# Altium PCB ZvezdaInputSelector.PcbDoc
Units mm, origin at the board's own origin, x right, y up, seen from the top; angles counter-clockwise.
Board outline 99.06 x 48.26 mm, 2 copper layers (Top Layer, Bottom Layer); 54 components, 59 nets, 227 pads, 69 vias.
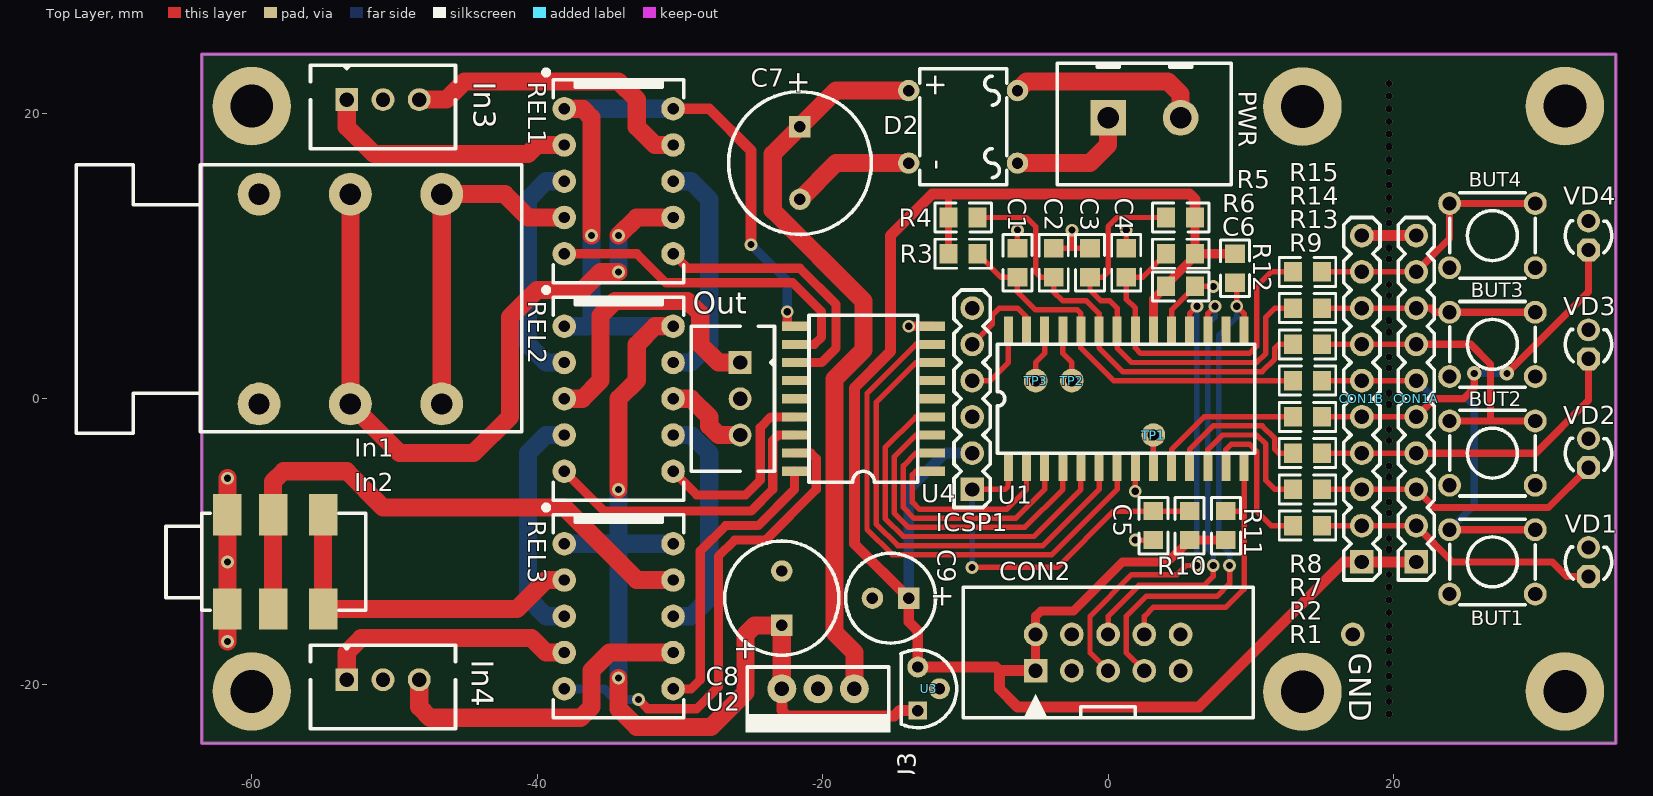
[diagram p0: Top Layer view]
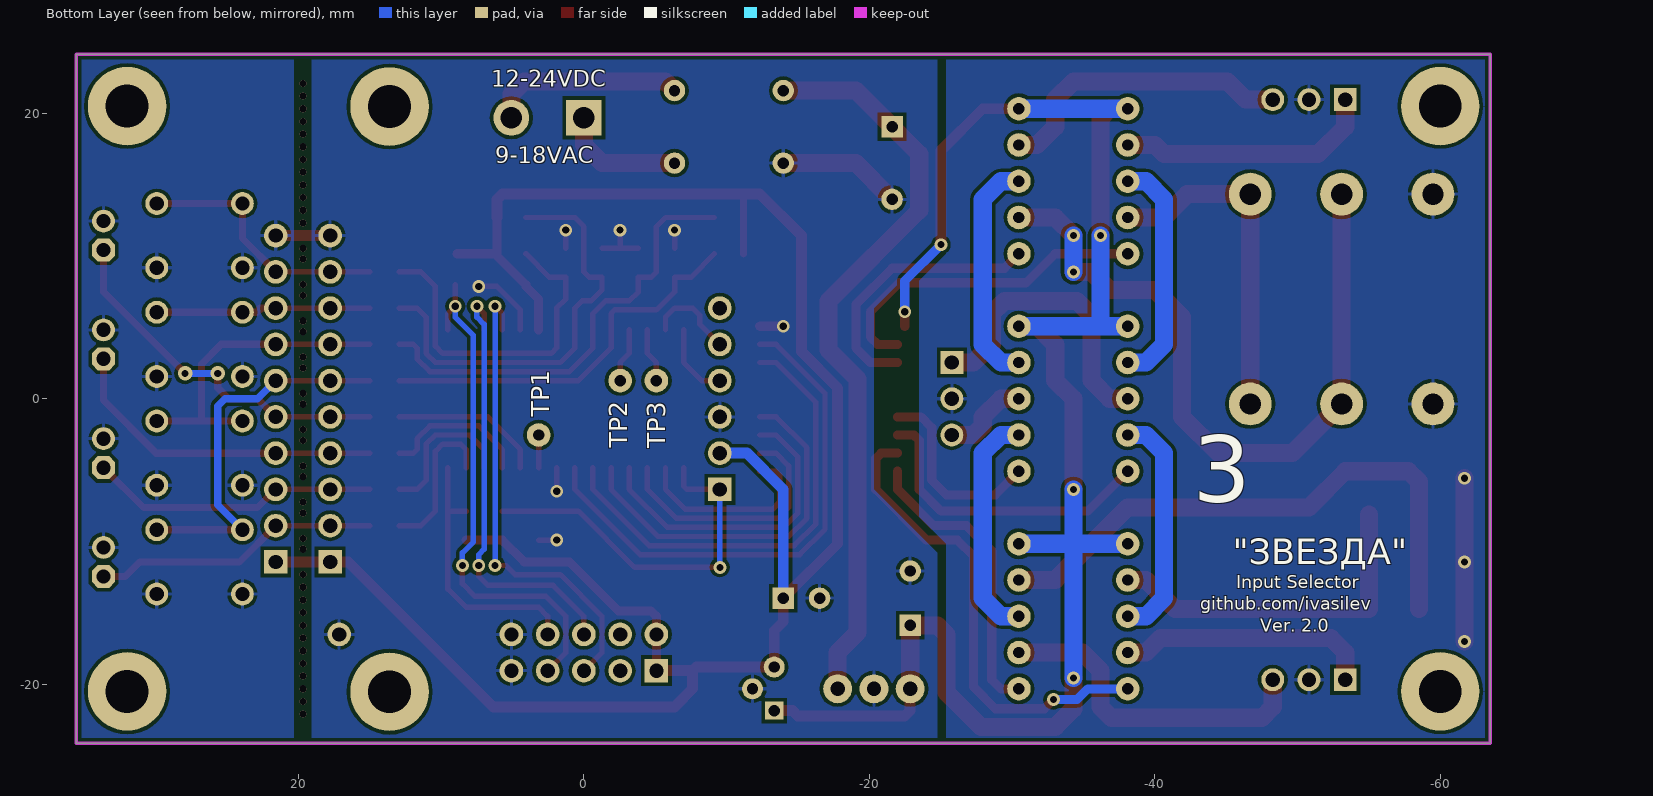
[diagram p1: Bottom Layer view, seen from below]

## Layer stack, top to bottom
Top Layer: signal copper 0.0356
Dielectric: dielectric 0.32, FR-4, Dk 4.8
Bottom Layer: signal copper 0.0356

## Board outline
-63.5,-24.13 35.56,-24.13 35.56,24.13 -63.5,24.13

## Design rules (kind name [scope] priority, off if disabled: settings)
Clearance [All] p1: gap=0.241
ComponentClearance [All] p1 off: gap=0.254 collisioncheckmode=3 verticalgap=0.254
HoleSize [All] p1: absolutevalues=TRUE maxlimit=5 minlimit=0.5 maxpercent=80.000 minpercent=20.000
PolygonConnect PolygonConnect_via [isVia] p1: connectstyle=Direct reliefconductorwidth=0.254 reliefentries=4 polygonreliefangle="90 Angle"
PolygonConnect [All] p2: connectstyle=Relief reliefconductorwidth=0.254 reliefentries=4 polygonreliefangle="90 Angle"
RoomDefinition Main [InComponentClass('Main')] p1 off: confinementstyle=ConfineIn formatcopy=TRUE lockcomponents=FALSE outline -63.5,-24.13 35.56,-24.13 35.56,24.13 -63.5,24.13
RoomDefinition U_Power [InComponentClass('U_Power')] p2 off: confinementstyle=ConfineIn formatcopy=TRUE lockcomponents=FALSE outline -24.13,-24.13 19.685,-24.13 19.685,24.13 -24.13,24.13
RoomDefinition U_Control [InComponentClass('U_Control')] p3 off: confinementstyle=ConfineIn formatcopy=TRUE lockcomponents=FALSE outline -17.78,-24.13 20.32,-24.13 20.32,24.13 -17.78,24.13
RoomDefinition U_Selector [InComponentClass('U_Selector')] p4 off: confinementstyle=ConfineIn formatcopy=TRUE lockcomponents=FALSE outline -63.5,-24.13 -10.16,-24.13 -10.16,24.13 -63.5,24.13
RoomDefinition U_UserInterface [InComponentClass('U_UserInterface')] p5 off: confinementstyle=ConfineIn formatcopy=TRUE lockcomponents=FALSE outline 19.685,-24.13 35.56,-24.13 35.56,24.13 19.685,24.13
RoutingVias [All] p1: holewidth=0.711 width=1.27 viastyle="Through Hole" minholewidth=0.711 minwidth=1.27 maxholewidth=0.711 maxwidth=1.27
SolderMaskExpansion [All] p1: expansion=0.102
TestPointUsage [All] p1: valid=0 allowmultiple=FALSE
Testpoint [All] p1: side=15 testpointundercomponent=TRUE minsize=1.016 maxsize=2.54 preferedsize=1.524 minholesize=0 maxholesize=1.016 preferedholesize=0.813 testpointgrid=0.025 style=1023 order=0123456789
Width [All] p1: maxlimit=2.54 minlimit=0.254 preferedwidth=0.254 toplayer_prefwidth=0.381 bottomlayer_prefwidth=0.381 minimp=50.000000 maximp=50.000000 favimp=50.000000
17 further rules are at their usual default settings.

## Classes and differential pairs
component class Main: CON1A CON1B CON2 GND In1 In2 In3 In4 Out PWR
component class U_Control: C1 C2 C3 C4 C5 C6 ICSP1 R1 R2 R3 R4 R5 R6 R7 R8 R9 R10 R11 R12 R13 R14 R15 TP1 TP2 TP3 U1
component class U_Power: C7 C8 C9 D2 U2 U3
component class U_Selector: REL1 REL2 REL3 U4
component class U_UserInterface: BUT1 BUT2 BUT3 BUT4 VD1 VD2 VD3 VD4

## Components (designator, comment, footprint, x,y, rotation, side; value= is the part's Value field where it differs from the comment)
BUT1 "TS-06x" BUT_6X6 26.924,-11.43 r0 top
BUT2 "TS-06x" BUT_6X6 26.924,-3.81 r0 top
BUT3 "TS-06x" BUT_6X6 26.924,3.81 r0 top
BUT4 "TS-06x" BUT_6X6 26.924,11.43 r0 top
C1 "100nF" 0805_1 -6.35,9.525 r90 top
C2 "100nF" 0805_1 -3.81,9.525 r90 top
C3 "100nF" 0805_1 -1.27,9.525 r90 top
C4 "100nF" 0805_1 1.27,9.525 r90 top
C5 "10nF" 0805_1 3.175,-8.89 r270 top
C6 "100nF" 0805_1 5.08,7.874 r0 top
C7 "470uF/35V" EC10x20 -21.59,16.51 r270 top
C8 "470uF/35V" EC8x16 -22.86,-13.97 r90 top
C9 "1000uF/16V" EC6.3x12 -15.24,-13.97 r180 top
CON1A "Header 10" JP10 21.59,0 r90 top
CON1B "Header 10" JP10 17.78,0 r90 top
CON2 "BH10S" BH10S 0,-17.78 r180 top
D2 "DB107" BRIDGE_PTH -10.16,19.05 r90 top
GND "TESTPAD" MISC_PAD-36/65 17.145,-16.51 r90 top (schematic designator TP4)
ICSP1 "CON6" JP6 -9.525,0 r90 top
In1 "Audio Socket" Schurter4803.2330 -53.086,6.985 r180 top
In2 "Audio Socket" MULTICOMP-MJ4435-R -63.5,-11.43 r0 top
In3 "CON3" CON_WS03S -50.8,20.955 r0 top
In4 "CON3" CON_WS03S -50.8,-19.685 r0 top
Out "CON3" CON_WS03S -25.781,0 r270 top
PWR "Power" CONN_TOP_2P 2.54,19.685 r0 top
R1 "330" 0805_1 13.97,-8.89 r180 top
R2 "330" 0805_1 13.97,-6.35 r180 top
R3 "10k" 0805_1 -10.16,10.16 r180 top
R4 "10k" 0805_1 -10.16,12.7 r180 top
R5 "10k" 0805_1 5.08,12.7 r0 top
R6 "10k" 0805_1 5.08,10.16 r0 top
R7 "330" 0805_1 13.97,-3.81 r180 top
R8 "330" 0805_1 13.97,-1.27 r180 top
R9 "1k" 0805_1 13.97,1.27 r0 top
R10 "10k" 0805_1 5.715,-8.89 r270 top
R11 "4.7k" 0805_1 8.255,-8.89 r270 top
R12 "4.7k" 0805_1 8.89,9.144 r90 top
R13 "1k" 0805_1 13.97,3.81 r0 top
R14 "1k" 0805_1 13.97,6.35 r0 top
R15 "1k" 0805_1 13.97,8.89 r0 top
REL1 "AZ850-P2" RELAY_AZ850 -34.29,15.24 r270 top
REL2 "AZ850-P2" RELAY_AZ850 -34.29,0 r270 top
REL3 "AZ850-P2" RELAY_AZ850 -34.29,-15.24 r270 top
TP1 "TESTPAD" PAD-36/65 3.175,-2.54 r0 top
TP2 "TESTPAD" PAD-36/65 -2.54,1.27 r90 top
TP3 "TESTPAD" PAD-36/65 -5.08,1.27 r90 top
U1 "PIC18F26K20-I/SO" SOIC-28 1.27,0 r90 top
U2 "7812" TO-220-V -20.32,-20.32 r180 top
U3 "78L33" IC_TO-92 -13.335,-20.32 r270 top
U4 "ULN2803" IC_SOIC-18 -17.145,0 r180 top
VD1 "LED" LED_3MM 33.655,-11.43 r90 top
VD2 "LED" LED_3MM 33.655,-3.81 r90 top
VD3 "LED" LED_3MM 33.655,3.81 r90 top
VD4 "LED" LED_3MM 33.655,11.43 r90 top

## Footprints (in the part's own frame and the unit in brackets; to place one, negate y for a bottom-side part, rotate by r counter-clockwise, add the part's x,y. Pads: shape width x height; smd on the part's side, far side on the other; paste and mask are expansions set on the pad)
0805_1 [mil]
  rect 50x54 smd: 1(-40,0) 2(40,0)
  silkscreen extent -78,-40 78,40
BH10S [mil] "BH-10"
  rect 65x65 hole 39.37: 1(200,50)
  round 65 hole 39.37: 2(200,-50) 3(100,50) 4(100,-50) 5(0,50) 6(0,-50) 7(-100,50) 8(-100,-50) 9(-200,50) 10(-200,-50)
  silkscreen extent -400,-180 400,180
BRIDGE_PTH [mm]
  round 1.5 hole 0.8: 1(-2.54,-3.81) 2(2.54,-3.81) 3(2.54,3.81) 4(-2.54,3.81)
  silkscreen extent -4.06,-3.05 4.06,3.05
BUT_6X6 [mm] "TS-06"
  round 1.6 hole 1: 1(-3,-2.25) 1(3,-2.25) 2(-3,2.25) 2(3,2.25)
  silkscreen extent -3,-3 3,3
CON_WS03S [mm] "2.50mm connector, PCB mount, mate with HS2"
  rect 1.6x1.6 hole 1: 1(-2.54,0)
  round 1.6 hole 1: 2(0,0) 3(2.54,0)
  silkscreen extent -5.08,-3.43 5.08,2.41
CONN_TOP_2P [mm] "Weidumuller - SL 5.08/2/180B"
  rect 2.5x2.5 hole 1.5: 1(-2.54,0)
  round 2.5 hole 1.5: 2(2.54,0)
  silkscreen extent -6.1,-4.7 6.1,3.81
EC6.3x12 [mm] "470uF/6.3V;330uF/10V;220uF/16V;100uF/25V;68uF/35V;47uF/50V;33uF/63V;10uF/100V;2.2uF/160V;2.2uF/200V;1uF/250V;1uF/350V"
  rect 1.5x1.5 hole 0.8: 1(-1.27,0)
  round 1.5 hole 0.8: 2(1.27,0)
  silkscreen extent -3.15,-3.15 3.15,3.15
EC8x16 [mm] "1000uF/6.3V;1000uF/10V;1000uF/16V;470uF/25V;220uF/35V;100uF/50V;100uF/63V;33uF/100V;4.7uF/160V;3.3uF/200V;2.2uF/250V;1uF/400V;1uF/450V"
  rect 1.5x1.5 hole 0.8: 1(-1.905,0)
  round 1.5 hole 0.8: 2(1.905,0)
  silkscreen extent -4,-4 4,4
EC10x20 [mm] "3300uF/6.3V;2200uF/10V;1000uF/25V;680uF/35V;330uF/50V;220uF/63V;100uF/100V;33uF/160V;33uF/200V;22uF/250V;10uF/350V;10uF/400V;6.8uF/450V"
  rect 1.5x1.5 hole 0.8: 1(-2.54,0)
  round 1.5 hole 0.8: 2(2.54,0)
  silkscreen extent -5,-5 5,5
IC_SOIC-18 [mil] "For PIC18F1x20-SO"
  rect 70x25 smd: 1(-190,200) 2(-190,150) 3(-190,100) 4(-190,50) 5(-190,0) 6(-190,-50) 7(-190,-100) 8(-190,-150) 9(-190,-200) 10(190,-200) 11(190,-150) 12(190,-100) 13(190,-50) 14(190,0) 15(190,50) 16(190,100) 17(190,150) 18(190,200)
  silkscreen extent -150,-230 150,230
IC_TO-92 [mil] "For 78Lxx"
  rect 50x50 hole 31.5: 1(60,0)
  round 57.99 hole 31.5: 2(0,60)
  round 58 hole 31.5: 3(-60,0)
  silkscreen extent -107,-47 107,107
JP6 [mil] "Jumper header, 6pin"
  rect 65x65 hole 39.37: 1(-250,0)
  round 65 hole 39.37: 2(-150,0) 3(-50,0) 4(50,0) 5(150,0) 6(250,0)
  silkscreen extent -300,-50 300,50
JP10 [mil] "Jumper header, 10pin"
  rect 65x65 hole 39.37: 1(-450,0)
  round 65 hole 39.37: 2(-350,0) 3(-250,0) 4(-150,0) 5(-50,0) 6(50,0) 7(150,0) 8(250,0) 9(350,0) 10(450,0)
  silkscreen extent -500,-50 500,50
LED_3MM [mm] "LED 3MM"
  oct 1.6x1.6 hole 1: 1(-1.016,0)
  round 1.6 hole 1: 2(1.016,0)
  silkscreen extent -1.22,-1.62 1.05,1.62
MISC_PAD-36/65 [mil]
  round 65 hole 39.37: 1(0,0)
MULTICOMP-MJ4435-R [mm] "3.5mm Phono jack, PCB, SMD"
  rect 2x2.9 smd: 1(1.8,-3.3) 1(1.8,3.3) 2(5,-3.3) 2(5,3.3) 3(8.5,-3.3) 3(8.5,3.3)
  silkscreen extent -2.5,-3.4 11.5,3.4
PAD-36/65 [mil]
  round 65 hole 31.5: 1(0,0)
RELAY_AZ850 [mil] "AZ850 (and others) relay"
  round 65 hole 31.5: 1(-200,-150) 2(-100,-150) 3(0,-150) 4(100,-150) 5(200,-150) 6(200,150) 7(100,150) 8(0,150) 9(-100,150) 10(-200,150)
  silkscreen extent -307,-207 280,180
Schurter4803.2330 [mm] "1/4in audio socket"
  round 3 hole 1.5: 1(-6.4,-7.35) 2(0,-7.35) 3(6.4,-7.35) 4(6.4,7.35) 5(0,7.35) 6(-6.4,7.35)
  silkscreen extent -12,-9.4 19.2,9.4
SOIC-28 [mil] "for PIC18F2525-SO"
  rect 75x25 smd: 1(-190,325) 2(-190,275) 3(-190,225) 4(-190,175) 5(-190,125) 6(-190,75) 7(-190,25) 8(-190,-25) 9(-190,-75) 10(-190,-125) 11(-190,-175) 12(-190,-225) 13(-190,-275) 14(-190,-325) 15(190,-325) 16(190,-275) 17(190,-225) 18(190,-175) 19(190,-125) 20(190,-75) 21(190,-25) 22(190,25) 23(190,75) 24(190,125) 25(190,175) 26(190,225) 27(190,275) 28(190,325)
  silkscreen extent -150,-355 150,355
TO-220-V [mil]
  round 80 hole 39.37: 1(-100,0) 2(0,0) 3(100,0)
  silkscreen extent -200,-60 200,120

## Part data
BUT1 BUT2 BUT3 BUT4: library part SW_TS06, "Tactile push-button"
C1 C2 C3 C4 C5 C6: library part CAP, "Capacitor"
C7 C8 C9: library part ELECTRO1, "Electrolytic Capacitor"
CON1A CON1B: "Header, 10-Pin"
CON2: library part CON2x5, "BH10S-side mounted"
D2: library part BRIDGE
ICSP1 In3 In4 Out: "Connector"
In1: library part SOCKET_AUDIO_3WAY_SW
In2: library part SOCKET_AUDIO_3WAY_NOSW
PWR: library part CON2, "Connector"
R1 R2 R3 R4 R5 R6 R7 R8 R9 R10 R11 R12 R13 R14 R15: library part RES, "Resistor"
REL1 REL2 REL3: "bi-stable relay"
U1: "PIC18 mid-range mcu"
U2 U3: library part 78XX
U4: "HIGH-VOLTAGE,HIGH-CURRENT DARLINTON ARRAYS"
VD1 VD2 VD3 VD4: "LED, 3mm"

## Free pads (board coordinates)
  round 5.5 hole 3: 1(-60,-20.5) 1(-60,20.5) 1(13.615,-20.525) 1(13.615,20.475) 1(32,-20.5) 1(32,20.5)

## Via types
v1: diameter 0.495, hole 0.5, Top Layer to Bottom Layer, tented both sides, 42 vias
v2: diameter 0.9, hole 0.5, Top Layer to Bottom Layer, tented both sides, 25 vias
v3: diameter 1.016, hole 0.5, Top Layer to Bottom Layer, tented both sides, 2 vias

## Nets (pads, with @x,y where several pads share a name; then routed paths per layer and width w, separated by ;. In a path a pad name is that pad's centre, name@x,y a point inside that pad or via, vN(x,y) a via of type N, cw(c..) or ccw(c..) an arc to the next point about the centre after c; other vN are vias at no path point)
3.3V: C6.1 C9.1 CON1A.1 CON1B.1 CON2.1 CON2.2 ICSP1.2 R3.2 R4.2 R5.2 R6.2 R10.2 R11.2 R12.2 U1.20 U3.3 | length 149.2
  Top Layer w0.508: R3.2 -11.176,14.351
  Top Layer w0.635: CON2.1 -5.08,-15.24 -4.699,-14.859 -2.413,-14.859 1.016,-11.43 4.191,-11.43 R10.2 R11.2 ; U1.20 3.175,6.985 C6.1 4.064,8.001 6.096,10.033 R5.2 ; R6.2 R12.2
  Top Layer w0.762: CON2.1 -7.62,-19.05 ; R5.2 6.096,13.97 5.715,14.351 -12.319,14.351 -15.24,11.43 -15.24,3.302 -17.78,0.762 -17.78,-10.16 C9.1 -13.97,-15.621 -13.335,-16.256 U3.3 -7.874,-18.796 -7.62,-19.05 ; CON1A.1 16.51,-11.43 6.35,-21.59 -6.35,-21.59 -7.62,-20.32 -7.62,-19.05
  Bottom Layer w0.762: C9.1 -13.97,-6.35 -11.43,-3.81 ICSP1.2
AGND: In1.3 In1.4 In2.1 In3.2 In4.2 Out.2 | length 11.5
  Top Layer w1.27: v2(-61.7,-17.018) v2(-61.7,-5.566)
  other v2: -61.7,-11.43
GND: BUT1.1 BUT2.1 BUT3.1 BUT4.1 C1.2 C2.2 C3.2 C4.2 C5.2 C6.2 C7.2 C8.2 C9.2 CON1A.10 CON1B.10 CON2.9 CON2.10 D2.4 GND.1 ICSP1.3 U1.8 U1.19 U2.2 U3.2 U4.9 VD1.2 VD2.2 VD3.2 VD4.2 | length 28.4
  Top Layer w0.381: C1.2 v2(-6.35,11.811) ; C2.2 C3.2 ; -2.54,10.541 v2(-2.54,11.811) ; C4.2 v2(1.27,11.811) ; v2(1.905,-9.906) C5.2 ; v2(1.905,-6.477) U1.8 ; U1.19 4.445,6.223 C6.2 v2(7.366,7.874)
  Top Layer w0.635: v2(-13.97,5.08) U4.9
  Top Layer w0.762: CON1B.10 CON1A.10
  Top Layer w1.27: C7.2 -19.05,16.51 D2.4
M\C\L\R\: C5.1 ICSP1.1 R10.1 U1.1 | length 26.2
  Top Layer w0.381: v2(-9.525,-11.811) -3.556,-11.811 0.381,-7.874 R10.1 ; ICSP1.1 -7.239,-6.35 -6.985,-6.096 U1.1
  Bottom Layer w0.381: v2(-9.525,-11.811) ICSP1.1
NetBUT1_2: BUT1.2 CON1A.6 CON1B.6 R9.2 | length 27.2
  Top Layer w0.381: R9.2 CON1A.6
  Top Layer w0.508: BUT1.2@23.924,-9.18 BUT1.2@30.305,-9.18
  Bottom Layer w0.508: CON1A.6 22.86,0 25.146,0 25.654,-0.508 25.654,-7.45 BUT1.2@23.924,-9.18
NetBUT2_2: BUT2.2 CON1A.7 CON1B.7 R13.2 | length 22.7
  Top Layer w0.381: R13.2 CON1A.7
  Top Layer w0.508: CON1A.7 25.4,3.81 26.797,2.413 26.797,-1.56 ; BUT2.2@23.924,-1.56 BUT2.2@30.305,-1.56
NetBUT3_2: BUT3.2 CON1A.8 CON1B.8 R14.2 | length 15.6
  Top Layer w0.381: R14.2 CON1A.8
  Top Layer w0.508: CON1A.8 22.733,6.35 ; 22.606,6.35 22.896,6.06 BUT3.2@30.305,6.06
NetBUT4_2: BUT4.2 CON1A.9 CON1B.9 R15.2 | length 18.7
  Top Layer w0.381: R15.2 CON1A.9
  Top Layer w0.508: CON1A.9 23.924,11.224 23.924,13.68 BUT4.2@30.305,13.68
NetC1_1: C1.1 R3.1 R9.1 U1.24 | length 27.8
  Top Layer w0.381: R3.1 -7.493,8.509 C1.1 -6.35,7.493 -5.08,6.223 -2.159,6.223 -1.905,5.969 -1.905,3.556 0.381,1.27 R9.1
NetC2_1: C2.1 R4.1 R13.1 U1.23 | length 31.7
  Top Layer w0.381: R4.1 -5.715,12.7 -5.08,12.065 -5.08,8.89 -4.699,8.509 C2.1 -3.81,7.493 -3.175,6.858 -1.524,6.858 -0.635,5.969 -0.635,3.556 1.016,1.905 10.795,1.905 11.684,2.794 11.684,3.556 11.938,3.81 R13.1
NetC3_1: C3.1 R5.1 R14.1 U1.22 | length 30.8
  Top Layer w0.381: R5.1 0.635,12.7 0,12.065 0,8.89 -0.381,8.509 C3.1 -1.27,7.62 -0.508,6.858 0.127,6.858 0.635,6.35 0.635,3.556 1.651,2.54 10.414,2.54 11.049,3.175 11.049,5.715 11.684,6.35 R14.1
NetC4_1: C4.1 R6.1 R15.1 U1.21 | length 24.7
  Top Layer w0.381: R6.1 2.413,8.509 C4.1 1.27,6.985 1.905,6.35 1.905,3.556 2.286,3.175 9.906,3.175 10.414,3.683 10.414,7.874 11.43,8.89 R15.1
NetC7_1: C7.1 D2.3 U2.1 | length 52.9
  Top Layer w1.27: U2.1 -17.78,-17.78 -19.177,-16.383 -19.177,1.397 -17.145,3.429 -17.145,6.858 -23.495,13.208 -23.495,17.145 -19.05,21.59 D2.3
NetC8_1: C8.1 REL1.1 REL1.10 REL2.1 REL2.10 REL3.1 REL3.10 U2.3 U3.1 U4.10 | length 122
  Top Layer w0.635: U4.10@-22.479,5.08 v2(-22.479,6.096)
  Top Layer w0.762: REL1.10 -27.94,20.32 -25.019,17.399 v2(-25.019,10.795) ; U2.3 -22.86,-21.844 -22.479,-22.225 -14.986,-22.225 -14.605,-21.844 U3.1
  Top Layer w1.27: REL1.1 -36.83,20.32 -36.195,19.685 v2(-36.195,11.43) ; v2(-34.29,-19.558) -34.29,-21.717 -33.02,-22.987 -27.813,-22.987 -25.4,-20.574 -25.4,-16.51 -24.765,-15.875 C8.1 U2.3 ; v2(-34.29,-6.35) -34.29,0 -33.02,1.27 -33.02,3.81 -31.75,5.08 REL2.10 REL2.10@-30.48,4.953
  Bottom Layer w0.635: v2(-25.019,10.795) -22.479,8.255 v2(-22.479,6.096)
  Bottom Layer w1.27: REL3.1 REL3.10 ; REL2.1 REL2.10 ; REL1.1 REL1.10 ; -36.195,5.08 v2(-36.195,11.43) ; v2(-34.29,-19.558) v2(-34.29,-6.35)
NetCON1A_2: CON1A.2 CON1B.2 R1.1 VD1.1 | length 20.1
  Top Layer w0.381: R1.1 CON1A.2
  Top Layer w0.508: CON1A.2 24.13,-11.43 31.115,-11.43 32.131,-12.446 VD1.1
NetCON1A_3: CON1A.3 CON1B.3 R2.1 VD2.1 | length 20.5
  Top Layer w0.381: R2.1 CON1A.3
  Top Layer w0.508: CON1A.3 22.86,-7.62 30.861,-7.62 VD2.1
  Top Layer w0.762: CON1A.3 CON1A.3@21.59,-6.223
NetCON1A_4: CON1A.4 CON1B.4 R7.1 VD3.1 | length 23.1
  Top Layer w0.381: R7.1 CON1A.4
  Top Layer w0.508: CON1A.4 29.955,-3.81 33.655,-0.11 VD3.1
NetCON1A_5: CON1A.5 CON1B.5 R8.1 VD4.1 | length 25.8
  Top Layer w0.381: R8.1 CON1A.5
  Top Layer w0.508: CON1A.5 22.86,0 24.892,0 25.654,0.762 v3(25.654,1.778) ; v3(27.94,1.778) 33.655,7.493 VD4.1
  Bottom Layer w0.508: v3(25.654,1.778) v3(27.94,1.778)
NetD2_1: D2.1 PWR.1 | length 8.8
  Top Layer w1.27: D2.1 -1.27,16.51 0,17.78 PWR.1
NetD2_2: D2.2 PWR.2 | length 13.7
  Top Layer w1.27: D2.2 -5.715,22.225 4.191,22.225 5.08,21.336 PWR.2
NetIn1_1: In1.1 In1.6 REL1.4 | length 24
  Top Layer w1.27: In1.6 In1.1 -42.275,14.335 -40.64,12.7 REL1.4
NetIn1_2: In1.2 In1.5 REL1.7 | length 51.2
  Top Layer w1.27: In1.2 In1.5 -49.641,-3.81 -44.45,-3.81 -41.91,-1.27 -41.91,5.715 -40.005,7.62 -36.83,7.62 -35.56,8.89 v2(-34.29,8.89) ; v2(-34.29,11.43) -33.02,12.7 REL1.7
  Bottom Layer w1.27: v2(-34.29,8.89) v2(-34.29,11.43)
NetIn2_2: In2.2 REL3.9 | length 40.4
  Top Layer w1.27: In2.2@-58.5,-14.73 -58.5,-5.795 -57.785,-5.08 -53.34,-5.08 -50.8,-7.62 -38.1,-7.62 -33.02,-12.7 REL3.9
NetIn2_3: In2.3 REL3.2 | length 24.3
  Top Layer w1.27: In2.3@-55,-8.13 -55,-14.73 -41.4,-14.73 -39.37,-12.7 REL3.2
NetIn3_1: In3.1 REL1.2 | length 18.2
  Top Layer w1.27: In3.1 -53.34,19.05 -51.435,17.145 -40.64,17.145 -40.005,17.78 REL1.2
NetIn3_3: In3.3 REL1.9 | length 21.3
  Top Layer w1.27: In3.3 -46.355,20.955 -45.085,22.225 -34.29,22.225 -33.02,20.955 -33.02,19.05 -31.75,17.78 REL1.9
NetIn4_1: In4.1 REL3.4 | length 18
  Top Layer w1.27: In4.1 -53.34,-17.78 -52.324,-16.764 -40.386,-16.764 -39.37,-17.78 REL3.4
NetIn4_3: In4.3 REL3.7 | length 23.4
  Top Layer w1.27: In4.3 -48.26,-21.59 -47.498,-22.352 -36.957,-22.352 -36.195,-21.59 -36.195,-19.05 -34.925,-17.78 REL3.7
NetOut_1: Out.1 REL2.3 | length 20.9
  Top Layer w1.27: REL2.3 -36.83,0 -35.56,1.27 -35.56,5.842 -34.544,6.858 -29.464,6.858 -28.575,5.969 -28.575,3.81 -27.305,2.54 Out.1
NetOut_3: Out.3 REL2.8 | length 6.1
  Top Layer w1.27: REL2.8 -29.21,0 -27.94,-1.27 -27.94,-1.905 -27.305,-2.54 Out.3
NetR1_2: R1.2 U1.13 | length 10.9
  Top Layer w0.381: U1.13 8.255,-3.556 8.636,-3.175 9.906,-3.175 10.414,-3.683 10.414,-7.874 11.43,-8.89 R1.2
NetR2_2: R2.2 U1.12 | length 10.7
  Top Layer w0.381: U1.12 6.985,-3.556 8.001,-2.54 10.414,-2.54 11.049,-3.175 11.049,-5.715 11.684,-6.35 R2.2
NetR7_2: R7.2 U1.11 | length 10.4
  Top Layer w0.381: U1.11 5.715,-3.556 7.366,-1.905 10.795,-1.905 11.684,-2.794 11.684,-3.556 11.938,-3.81 R7.2
NetR8_2: R8.2 U1.10 | length 10.7
  Top Layer w0.381: U1.10 4.445,-3.556 6.731,-1.27 R8.2
NetREL1_3: REL1.3 REL2.2 | length 16.3
  Bottom Layer w1.27: REL2.2 -39.37,2.54 -40.64,3.81 -40.64,13.97 -39.37,15.24 REL1.3
NetREL1_5: REL1.5 U4.11 | length 23.6
  Top Layer w0.635: REL1.5 -33.02,10.16 -30.988,8.128 -22.098,8.128 -20.066,6.096 -20.066,4.318 -20.574,3.81 U4.11
NetREL1_6: REL1.6 U4.12 | length 19.3
  Top Layer w0.635: REL1.6 -29.464,9.144 -21.59,9.144 -19.05,6.604 -19.05,3.556 -20.066,2.54 U4.12
NetREL1_8: REL1.8 REL2.9 | length 16.3
  Bottom Layer w1.27: REL2.9 -29.21,2.54 -27.94,3.81 -27.94,13.97 -29.21,15.24 REL1.8
NetREL2_4: REL2.4 REL3.3 | length 16.3
  Bottom Layer w1.27: REL3.3 -39.37,-15.24 -40.64,-13.97 -40.64,-3.81 -39.37,-2.54 REL2.4
NetREL2_5: REL2.5 U4.16 | length 21.5
  Top Layer w0.635: REL2.5 -35.306,-7.874 -25.019,-7.874 -23.495,-6.35 -23.495,-2.921 -23.114,-2.54 U4.16
NetREL2_6: REL2.6 U4.15 | length 13.6
  Top Layer w0.635: REL2.6 -28.829,-6.731 -25.4,-6.731 -24.371,-5.702 -24.371,-2.019 -23.622,-1.27 U4.15
NetREL2_7: REL2.7 REL3.8 | length 16.3
  Bottom Layer w1.27: REL3.8 -29.21,-15.24 -27.94,-13.97 -27.94,-3.81 -29.21,-2.54 REL2.7
NetREL3_5: REL3.5 U4.17 | length 33.8
  Top Layer w0.635: v2(-32.893,-21.082) -32.258,-21.717 -28.829,-21.717 -27.305,-20.193 -27.305,-11.049 -26.162,-9.906 -24.003,-9.906 -20.447,-6.35 -20.447,-4.191 -20.828,-3.81 U4.17
  Bottom Layer w0.635: REL3.5 -35.306,-20.32 -34.544,-21.082 v2(-32.893,-21.082)
NetREL3_6: REL3.6 U4.18 | length 20.8
  Top Layer w0.635: REL3.6 -29.21,-20.32 -28.575,-19.685 -28.575,-10.668 -26.797,-8.89 -24.511,-8.89 -21.971,-6.35 U4.18
NetTP1_1: TP1.1 U1.9 | length 2.3
  Top Layer w0.381: U1.9 TP1.1
NetTP2_1: TP2.1 U1.25 | length 3.8
  Top Layer w0.381: U1.25 -3.175,3.175 -2.54,2.54 TP2.1
NetTP3_1: TP3.1 U1.26 | length 3.8
  Top Layer w0.381: TP3.1 -5.08,2.54 -4.445,3.175 U1.26
NetU1_2: U1.2 U4.1 | length 13.7
  Top Layer w0.381: U4.1 -13.462,-5.08 -13.716,-5.334 -13.716,-7.239 -13.208,-7.747 -7.112,-7.747 -5.715,-6.35 U1.2
NetU1_3: U1.3 U4.2 | length 17.9
  Top Layer w0.381: U4.2 -13.462,-3.81 -14.351,-4.699 -14.351,-7.62 -13.589,-8.382 -6.477,-8.382 -4.445,-6.35 U1.3
NetU1_4: U1.4 U4.3 | length 22.1
  Top Layer w0.381: U4.3 -13.462,-2.54 -14.986,-4.064 -14.986,-8.001 -13.97,-9.017 -5.842,-9.017 -3.175,-6.35 U1.4
NetU1_5: U1.5 U4.4 | length 26.3
  Top Layer w0.381: U4.4 -13.462,-1.27 -15.621,-3.429 -15.621,-8.382 -14.351,-9.652 -5.207,-9.652 -1.905,-6.35 U1.5
NetU1_6: U1.6 U4.7 | length 33
  Top Layer w0.381: U4.7 -13.462,2.54 -16.256,-0.254 -16.256,-8.763 -14.732,-10.287 -4.572,-10.287 -0.635,-6.35 U1.6
NetU1_7: U1.7 U4.8 | length 37.2
  Top Layer w0.381: U4.8 -13.462,3.81 -16.891,0.381 -16.891,-9.144 -15.113,-10.922 -3.937,-10.922 0.635,-6.35 U1.7
PGC: ICSP1.5 U1.27 | length 6.4
  Top Layer w0.381: ICSP1.5 -8.128,5.207 -8.128,5.842 -7.62,6.35 -6.35,6.35 -5.715,5.715 U1.27
PGD: ICSP1.4 U1.28 | length 5.4
  Top Layer w0.381: ICSP1.4 -8.255,1.27 -6.985,2.54 U1.28
RX: CON2.5 U1.18 | length 33.3
  Top Layer w0.381: CON2.5 -1.27,-17.78 -1.27,-15.24 1.651,-12.319 4.826,-12.319 5.461,-11.684 v2(6.223,-11.684) ; U1.18 5.715,5.969 v2(6.223,6.477)
  Bottom Layer w0.381: v2(6.223,-11.684) v2(6.223,6.477)
SCL: CON2.8 R11.1 U1.14 | length 18.8
  Top Layer w0.381: CON2.8 2.54,-15.24 3.175,-14.605 8.255,-14.605 9.525,-13.335 U1.14 ; R11.1 9.525,-7.874
SDA: CON2.7 R12.1 U1.15 | length 36.2
  Top Layer w0.381: CON2.7 1.27,-17.78 1.27,-15.24 2.667,-13.843 7.62,-13.843 8.509,-12.954 v2(8.509,-11.684) ; R12.1@9.017,8.001 v2(9.017,6.477) 9.525,5.969 U1.15
  Bottom Layer w0.381: v2(8.509,-11.684) 8.509,-10.795 7.747,-10.033 7.747,4.445 9.017,5.715 v2(9.017,6.477)
TX: CON2.6 U1.17 | length 30.9
  Top Layer w0.381: CON2.6 0,-15.24 2.159,-13.081 6.731,-13.081 7.366,-12.446 v2(7.366,-11.684) ; U1.17 6.985,5.969 v2(7.493,6.477)
  Bottom Layer w0.381: v2(7.366,-11.684) 7.366,-10.922 6.985,-10.541 6.985,5.207 7.493,5.715 v2(7.493,6.477)
pads on no net: CON2.3 CON2.4 ICSP1.6 U1.16 U4.5 U4.6 U4.13 U4.14
copper on no net:
  other v1: 19.685,-22.098 19.685,-21.209 19.685,-20.32 19.685,-19.431 19.685,-18.542 19.685,-17.653 19.685,-16.764 19.685,-15.875 19.685,-14.986 19.685,-14.097 19.685,-13.208 19.685,-12.319 19.685,-10.541 19.685,-9.779 19.685,-8.001 19.685,-7.239 19.685,-5.461 19.685,-4.699 19.685,-2.921 19.685,-2.159 19.685,-0.381 19.685,0.381 19.685,2.159 19.685,2.921 19.685,4.699 19.685,5.461 19.685,7.239 19.685,8.001 19.685,9.779 19.685,10.541 19.685,12.319 19.685,13.208 19.685,14.097 19.685,14.986 19.685,15.875 19.685,16.764 19.685,17.653 19.685,18.542 19.685,19.431 19.685,20.32 19.685,21.209 19.685,22.098

## Polygon pours and split planes (outlines as drawn)
GND on Bottom Layer "BOT_GND" (solid, remove dead copper, pour order 1000): 35.56,-24.13 -24.765,-24.13 -24.765,-10.795 -23.495,-9.525 -20.32,-6.35 -20.32,-1.905 -20.32,6.35 -24.765,10.795 -24.765,24.13 35.56,24.13
AGND on Bottom Layer "BOT_AGND" (solid, remove dead copper, pour order 1001): -63.5,-24.13 -63.5,24.13 -25.4,24.13 -25.4,10.16 -23.495,8.255 -23.495,-0.635 -23.495,-8.255 -25.4,-10.16 -25.4,-24.13

## Keep-outs
Keep-Out Layer:
  lines w0.254: -63.5,-24.13 -63.5,24.003 -63.5,24.13 35.56,24.13 35.56,-24.13 -63.5,-24.13

## Other copper
Bottom Layer:
  pour cut-out: 20.32,-24.13 20.32,24.13 19.05,24.13 19.05,-24.13

## Silkscreen, mask and mechanical layers (free items; w line width, h text height)
Bottom Overlay:
  text "12-24VDC" at 6.477,21.844 h1.14
  text "9-18VAC" at 6.223,16.51 h1.14
  text "3" at -42.672,-8.763 h8
  text "\"ЗВЕЗДА\"" at -45.466,-12.192 h3.05
  text "Input Selector" at -45.72,-13.589 h1.52
  text "github.com/ivasilev" at -43.18,-15.113 h1.52
  text "Ver. 2.0" at -47.371,-16.637 h1.52
Mechanical 1:
  the board outline again, w0.254

## Text inside footprints (layer, text, board x,y; h text height)
C7: Top Overlay "+" at -22.34,23.01 h1.5 r270
C8: Top Overlay "+" at -24.765,-18.415 h1.5 r90
C9: Top Overlay "+" at -10.74,-13.22 h1.5 r180
D2: Top Overlay "+" at -11.43,21.082 h1.52 r90; Top Overlay "-" at -11.43,16.002 h1.52 r90